# Altium PCB PCB1.PcbDoc (part 1 of 2)
Units mil, origin at the board's own origin, x right, y up, seen from the top; angles counter-clockwise.
Board outline 2835 x 2165.35 mil, 4 copper layers (Top01, GND02, PWR03, Bottom04), stack 23.756 mil thick; 53 components, 129 nets, 681 pads, 268 vias.
Unrouted connection lines stored in the file: 1.
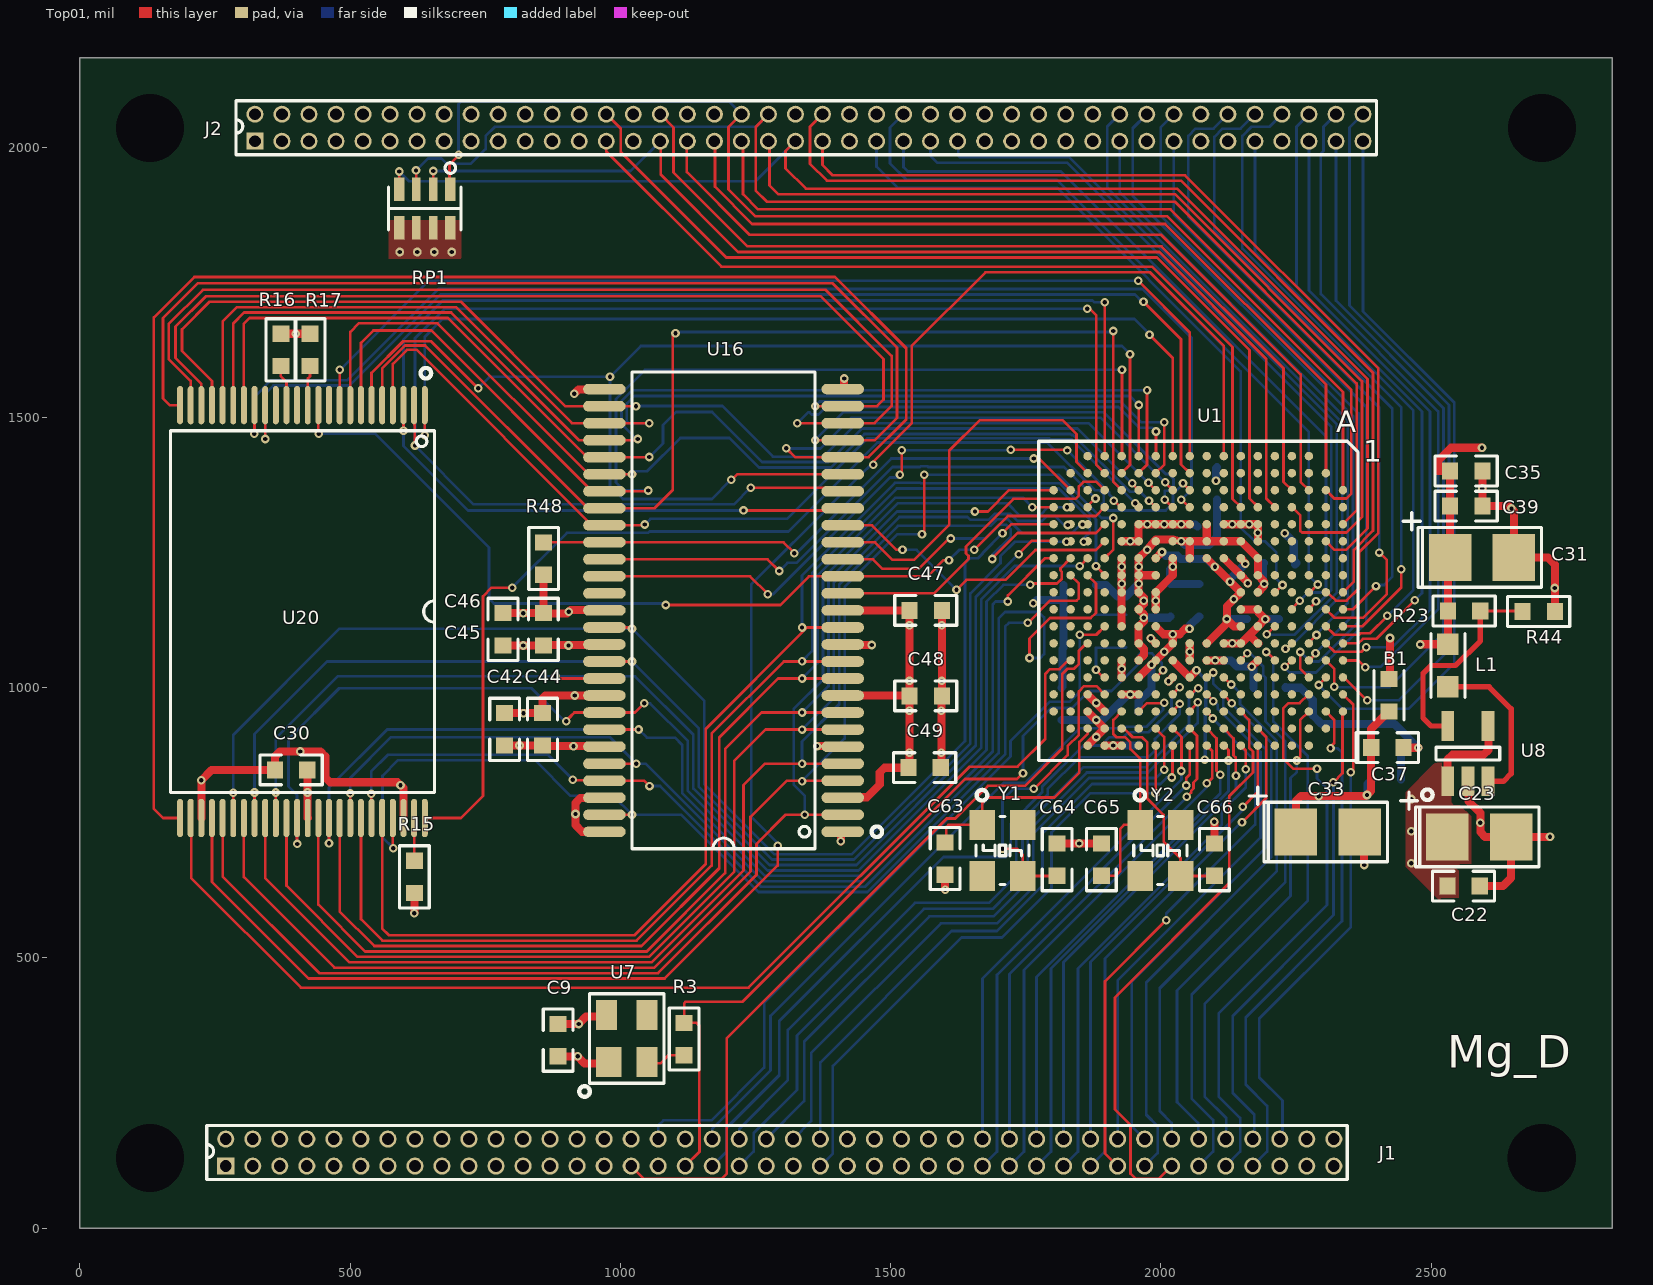
[diagram p0: Top01 view]
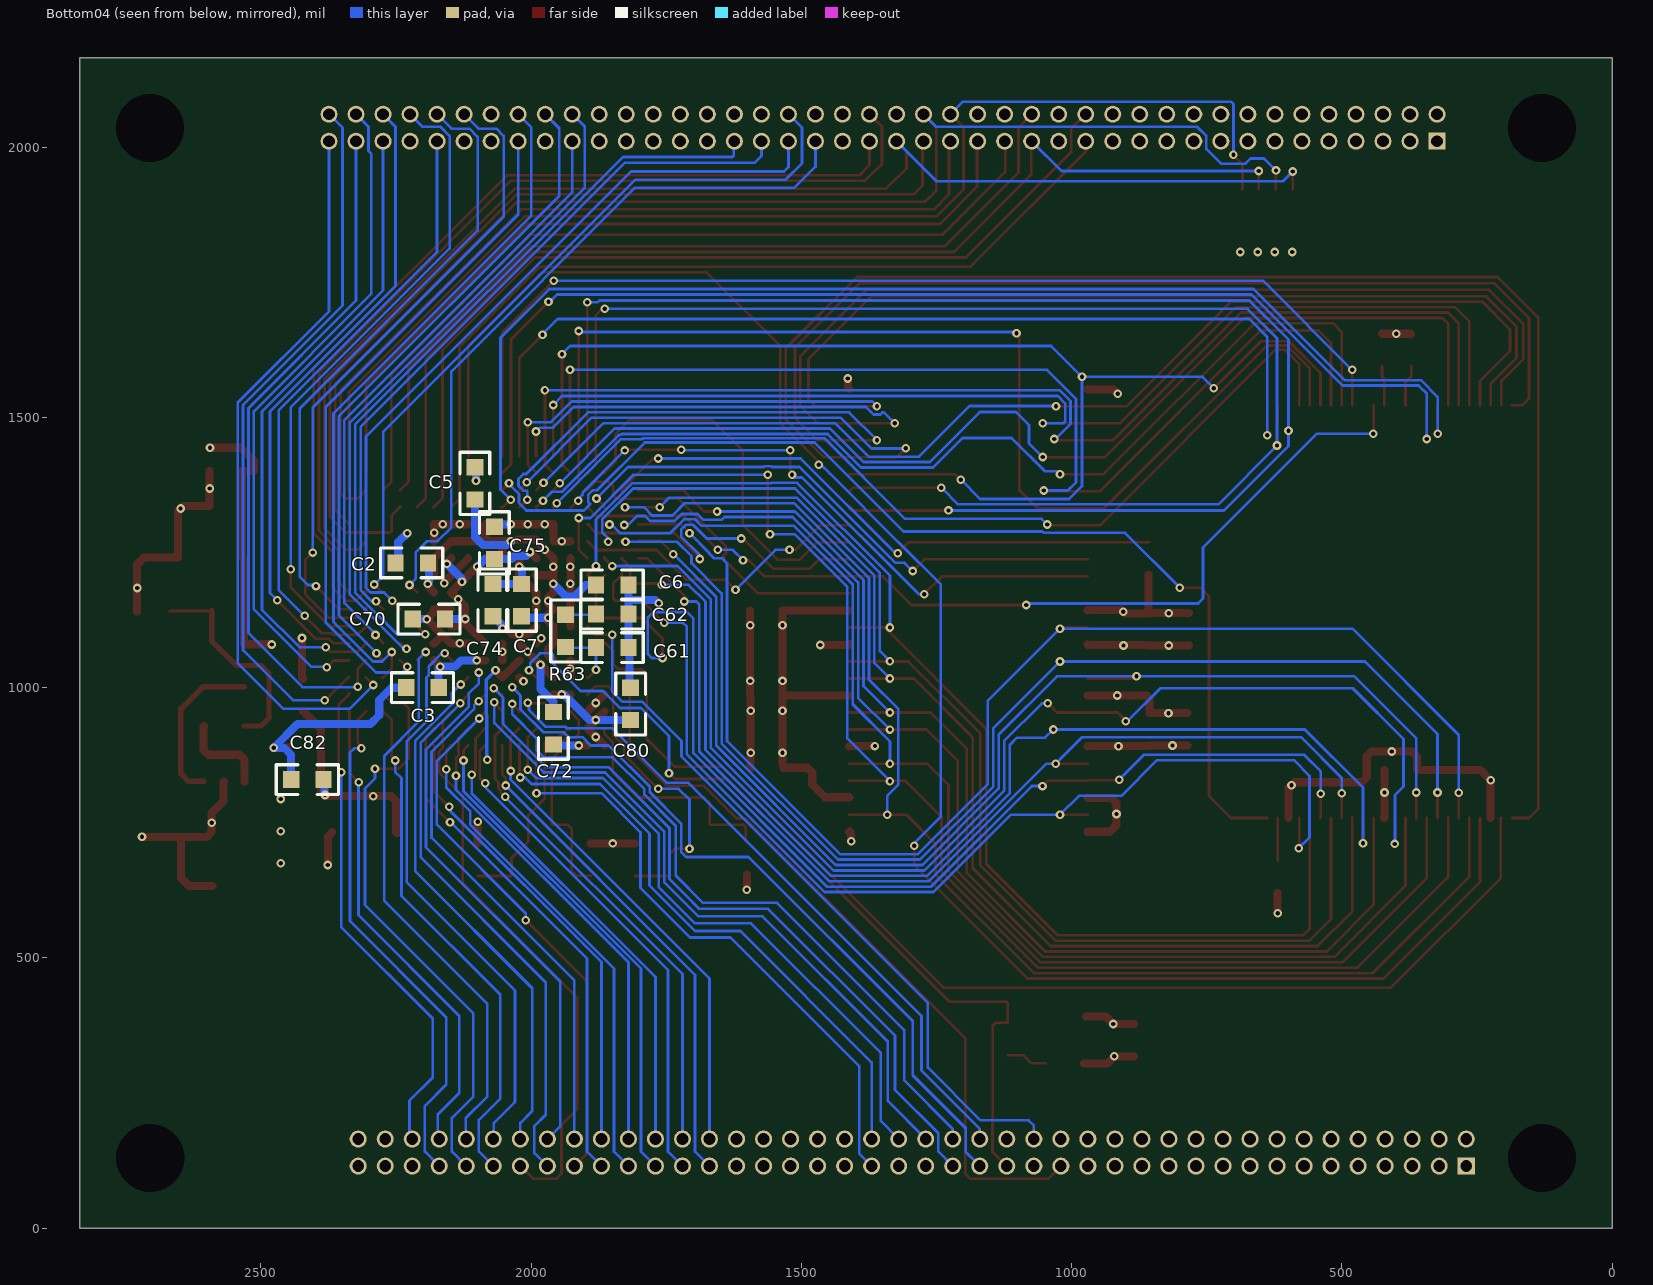
[diagram p1: Bottom04 view, seen from below]
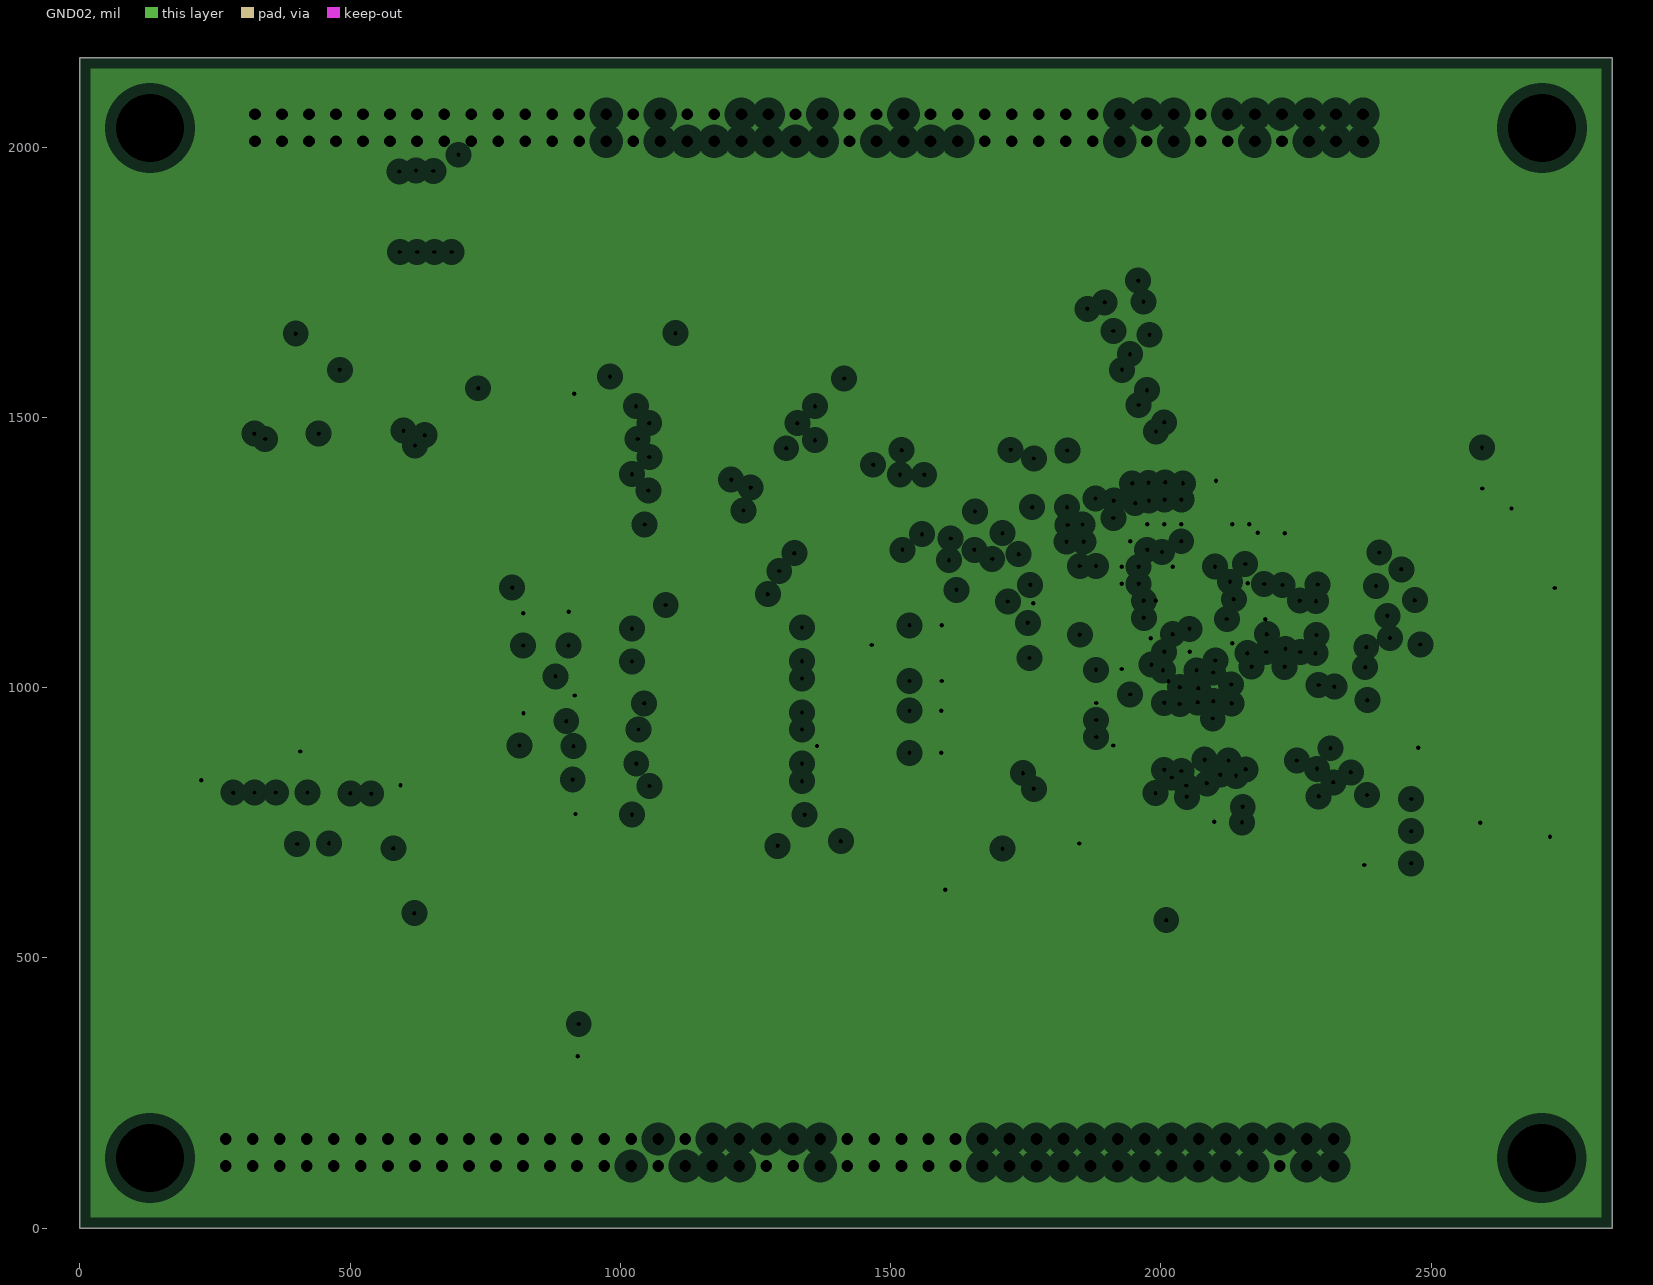
[diagram p2: GND02, clearances drawn from the general rule]
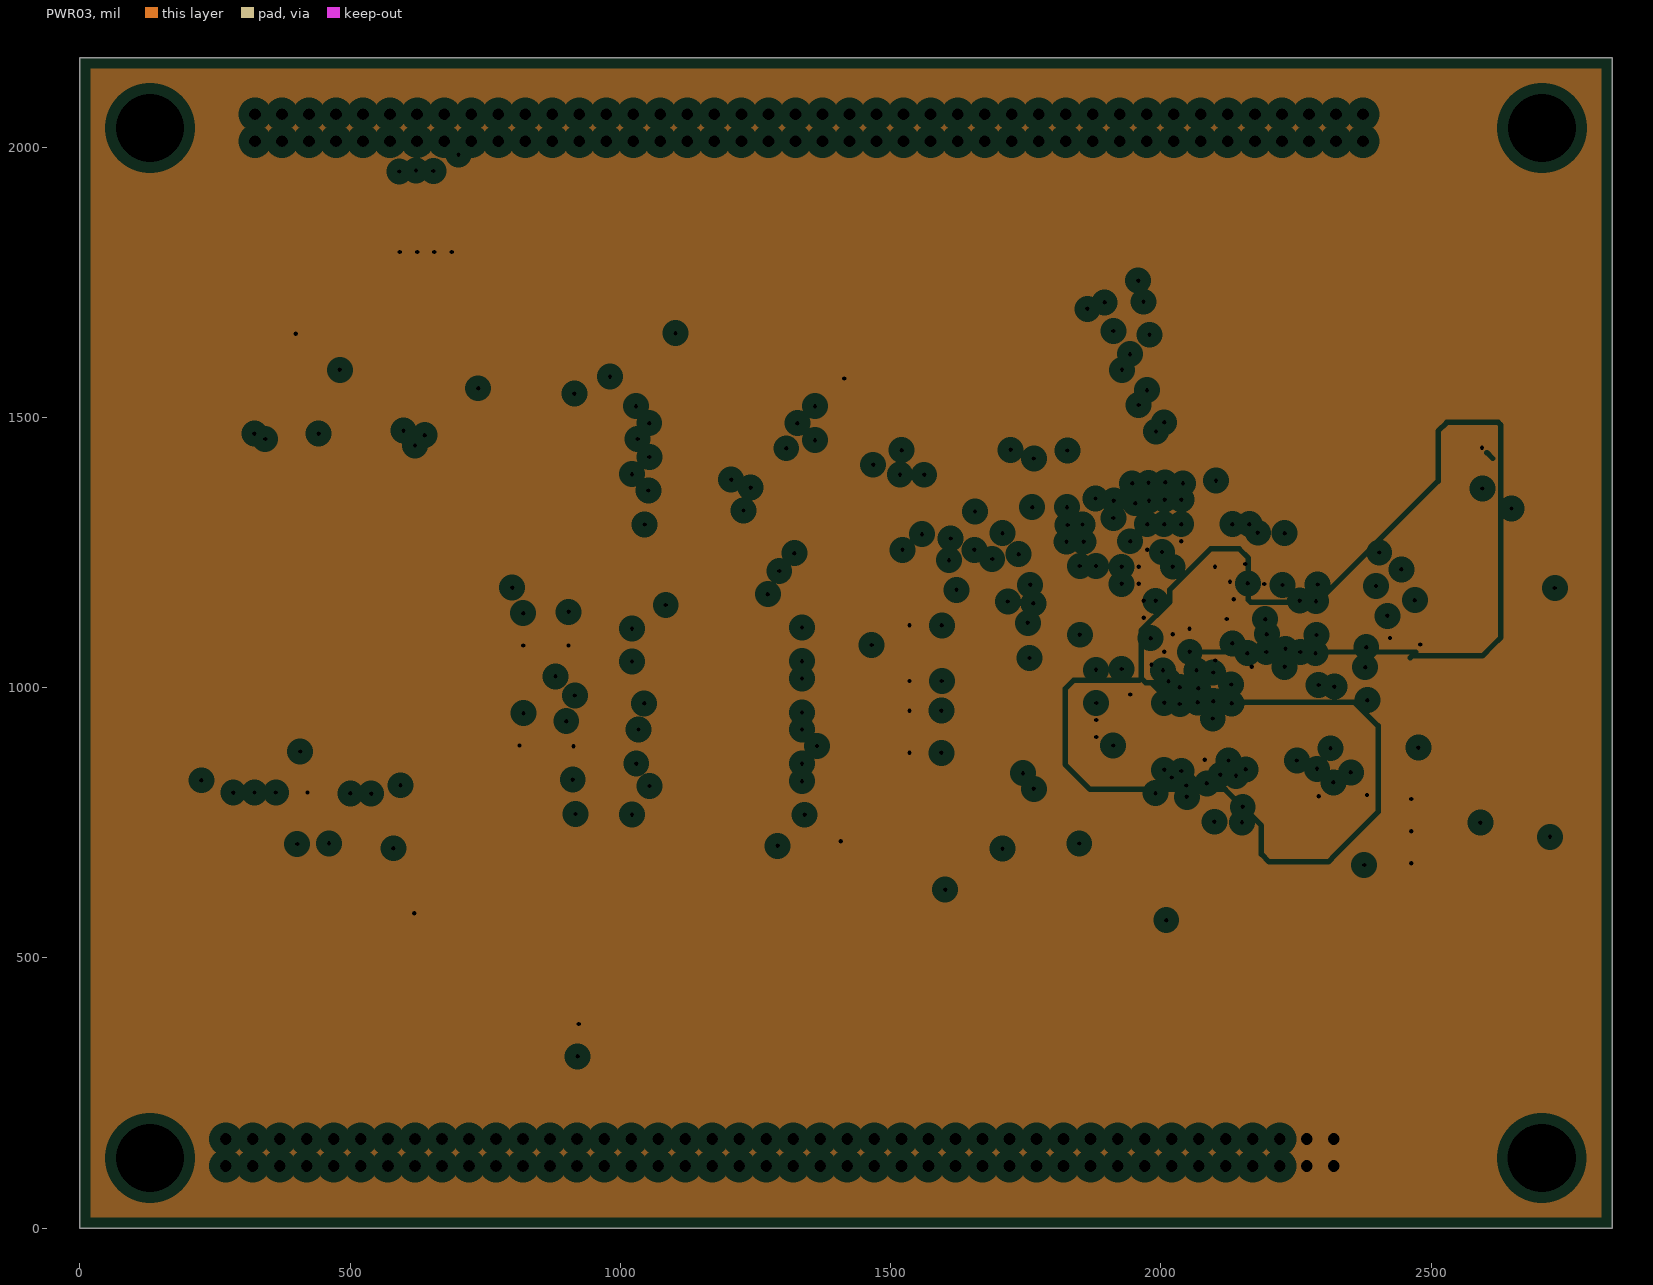
[diagram p3: PWR03, clearances drawn from the general rule]

## Layer stack, top to bottom
Top Solder: solder mask 0.4, Solder Resist, Dk 3.5
Top01: signal copper 1.4
Dielectric 2: prepreg 2.8, PP-006, Dk 4.1
GND02: plane copper 1.378, net GND
Dielectric 1: dielectric 12.6, FR-4, Dk 4.8
PWR03: plane copper 1.378, net (Multiple Nets)
Dielectric 3: prepreg 2.8, PP-006, Dk 4.1
Bottom04: signal copper 1.4
Bottom Solder: solder mask 0.4, Solder Resist, Dk 3.5

## Board outline
0,0 0,2165.35 2835,2165.35 2835,0

## Design rules (kind name [scope] priority, off if disabled: settings)
Clearance PAD-PAD [All] p1: gap=3 ignorepadtopadclearanceinfootprint=TRUE
Clearance [All] p2: gap=0 ignorepadtopadclearanceinfootprint=FALSE
PlaneClearance [All] p1: clearance=20
PlaneConnect [All] p1: planeconnectstyle=Direct reliefexpansion=20 reliefentries=4 reliefconductorwidth=10 reliefairgap=10
PolygonConnect [All] p1: connectstyle=Direct reliefconductorwidth=10 reliefentries=4 polygonreliefangle="90 Angle" airgapwidth=10
RoutingVias [All] p1: holewidth=8 width=16 viastyle="Through Hole" minholewidth=8 minwidth=16 maxholewidth=8 maxwidth=16
SolderMaskExpansion [All] p1: expansion=4
Width PWR [InNetClass('PWR')] p1: maxlimit=40 minlimit=5 preferedwidth=15
Width [All] p2: maxlimit=10 minlimit=5 preferedwidth=5
28 further rules are at their usual default settings.

## Classes and differential pairs
net class PWR: 1V2 1V2_PLL 3V3 GND
net class D[0..31]: D0 D1 D2 D3 D4 D5 D6 D7 D8 D9 D10 D11 D12 D13 D14 D15 D16 D17 D18 D19 D20 D21 D22 D23 D24 D25 D26 D27 D28 D29 D30 D31
net class A[0..23]: A0 A1 A2 A3 A4 A5 A6 A7 A8 A9 A10 A11 A12 A13 A14 A15 A16 A17 A18 A19 A20 A21 A22 A23
component class SDRAM: C42 C44 C45 C46 C47 C48 C49 R48 U16
component class INTERFACE: B1 C9 C22 C23 C31 C33 C35 C37 C39 J1 J2 L1 R3 R23 R44 U7 U8
component class FLASH: C30 C63 C64 C65 C66 R15 R16 R17 U20 Y1 Y2
component class EMC: U1
component class CPU: RP1
component class 01: C61 C62 R63

## Components (designator, comment, footprint, x,y, rotation, side; value= is the part's Value field where it differs from the comment)
B1 "B" 0603 2422,986 r270 top locked
C2 "104" 0603C 2221,1231 r0 bottom locked
C3 "104" 0603C 2201,1000 r0 bottom locked
C5 "104" 0603C 2104,1378 r90 bottom locked
C6 "104" 0603C 1850,1190 r180 bottom locked
C7 "104" 0603C 2018,1162 r90 bottom locked
C9 "104" 0603C 885,348 r270 top locked
C22 "104" 0603C 2560,633 r0 top locked
C23 "22uF" TC-3528 2589.06,724 r0 top locked
C30 "104" 0603C 391,848 r180 top locked
C31 "10uF" TC-3528 2594.06,1241 r0 top locked
C33 "10uF" TC-3528 2309,733 r0 top locked
C35 "103" 0603C 2564.92,1401 r0 top locked
C37 "104" 0603C 2419,889 r0 top locked
C39 "104" 0603C 2564.92,1336 r0 top locked
C42 "104" 0603C 786,923 r90 top locked
C44 "103" 0603C 856,923 r90 top locked
C45 "104" 0603C 857.51,1108 r90 top locked
C46 "104" 0603C 783,1108 r90 top locked
C47 "104" 0603C 1565,1143 r0 top locked
C48 "104" 0603C 1565,985 r0 top locked
C49 "104" 0603C 1563,852 r0 top locked
C61 "150pF 5%" 0603C 1850,1074 r180 bottom locked
C62 "3.9nF 5%" 0603C 1850,1136 r180 bottom locked
C63 "22pF" 0603C 1601,683.92 r270 top locked
C64 "22pF" 0603C 1808,682 r90 top locked
C65 "12pF" 0603C 1890,682 r90 top locked
C66 "12pF" 0603C 2099,682 r90 top locked
C70 "104" 0603C 2189,1127 r0 bottom locked
C72 "104" 0603C 1959,925.08 r270 bottom locked
C74 "104" 0603C 2071,1162 r90 bottom locked
C75 "104" 0603C 2068,1268 r90 bottom locked
C80 "104" 0603C 1816,970 r90 bottom locked
C82 "104" 0603C 2414,830 r0 bottom locked
J1 "CON_PLUG 42 x 2" DIP84 270,115 r90 top locked
J2 "CON_PLUG 42 x 2" DIP84 324,2011 r90 top locked
L1 "2.2uH" 0805 2531,1041 r90 top locked
R3 "470" 0603R 1118,350 r90 top locked
R15 "10K" 0603R 619,650 r270 top locked
R16 "10K" 0603R 372,1625 r90 top locked
R17 "10K" 0603R 426,1625 r90 top locked
R23 "100K 1%" 0603R 2561,1142 r180 top locked
R44 "100K 1%" 0603R 2699,1141 r180 top locked
R48 "10K" 0603R 858,1239 r270 top locked
R63 "120K 1%" 0603R 1936,1105 r90 bottom locked
RP1 "10K" PZ-4-0.8B 638.25,1886.57 r180 top locked
U1 "LPC3250" TFBGA296 2069.21,1160.73 r270 top locked
U7 "MAX811" MAX811 1012,351 r0 top locked
U8 "SP6669" SOT-23-5 2568,878 r0 top locked
U16 "HY57V561620CLT" TSSOP-54 1191,1143 r90 top locked
U20 "SST36VF1601" TSOP-48 411.84,1140.89 r180 top locked
Y1 "13M" XTAL-D 1707,699 r270 top locked
Y2 "32.768K" XTAL-D 1999,699 r270 top locked

## Footprints (in the part's own frame and the unit in brackets; to place one, negate y for a bottom-side part, rotate by r counter-clockwise, add the part's x,y. Pads: shape width x height; smd on the part's side, far side on the other; paste and mask are expansions set on the pad)
0603 [mm]
  rect 0.76x0.8 smd: 1(-0.76,0) 2(0.76,0)
  silkscreen extent -1.15,-0.7 1.15,0.7
0603C [mm]
  rect 0.76x0.8 smd: 1(-0.76,0) 2(0.76,0)
  silkscreen extent -1.46,-0.7 1.46,0.7
0603R [mm]
  rect 0.76x0.8 smd: 1(-0.76,0) 2(0.76,0)
  silkscreen extent -1.46,-0.7 1.46,0.7
0805 [mm]
  rect 1x1 smd: 1(-1,0) 2(1,0)
  silkscreen extent -1.5,-0.8 1.5,0.8
DIP84 [mm]
  rect 0.8x0.8 hole 0.55: 1(0,0)
  round 0.8 hole 0.55: 2(1.27,0) 3(0,-1.27) 4(1.27,-1.27) 5(0,-2.54) 6(1.27,-2.54) 7(0,-3.81) 8(1.27,-3.81) 9(0,-5.08) 10(1.27,-5.08) 11(0,-6.35) 12(1.27,-6.35) 13(0,-7.62) 14(1.27,-7.62) 15(0,-8.89) 16(1.27,-8.89) 17(0,-10.16) 18(1.27,-10.16) 19(0,-11.43) 20(1.27,-11.43) 21(0,-12.7) 22(1.27,-12.7) 23(0,-13.97) 24(1.27,-13.97) 25(0,-15.24) 26(1.27,-15.24) 27(0,-16.51) 28(1.27,-16.51) 29(0,-17.78) 30(1.27,-17.78) 31(0,-19.05) 32(1.27,-19.05) 33(0,-20.32) 34(1.27,-20.32) 35(0,-21.59) 36(1.27,-21.59) 37(0,-22.86) 38(1.27,-22.86) 39(0,-24.13) 40(1.27,-24.13) 41(0,-25.4) 42(1.27,-25.4) 43(0,-26.67) 44(1.27,-26.67) 45(0,-27.94) 46(1.27,-27.94) 47(0,-29.21) 48(1.27,-29.21) 49(0,-30.48) 50(1.27,-30.48) 51(0,-31.75) 52(1.27,-31.75) 53(0,-33.02) 54(1.27,-33.02) 55(0,-34.29) 56(1.27,-34.29) 57(0,-35.56) 58(1.27,-35.56) 59(0,-36.83) 60(1.27,-36.83) 61(0,-38.1) 62(1.27,-38.1) 63(0,-39.37) 64(1.27,-39.37) 65(0,-40.64) 66(1.27,-40.64) 67(0,-41.91) 68(1.27,-41.91) 69(0,-43.18) 70(1.27,-43.18) 71(0,-44.45) 72(1.27,-44.45) 73(0,-45.72) 74(1.27,-45.72) 75(0,-46.99) 76(1.27,-46.99) 77(0,-48.26) 78(1.27,-48.26) 79(0,-49.53) 80(1.27,-49.53) 81(0,-50.8) 82(1.27,-50.8) 83(0,-52.07) 84(1.27,-52.07)
  silkscreen extent -0.64,-52.7 1.91,0.89
MAX811 [mm]
  rect 1.2x1.4 smd: 1(-0.85,-1.1)
  rect 1x1.4 smd: 2(0.95,-1.1) 3(0.95,1.1) 4(-0.95,1.1)
  silkscreen extent -2.23,-2.74 1.75,2.1
PZ-4-0.8B [mm]
  rect 0.5x1.1 smd: 1(-1.2,-0.9) 4(1.2,-0.9) 5(1.2,0.9) 8(-1.2,0.9)
  rect 0.4x1.1 smd: 2(-0.4,-0.9) 3(0.4,-0.9) 6(0.4,0.9) 7(-0.4,0.9)
  silkscreen extent -1.7,-2.15 1.7,1
SOT-23-5 [mm]
  rect 0.6x1.4 smd: 1(-0.95,-1.3) 2(0,-1.3) 3(0.95,-1.3) 4(0.95,1.3) 5(-0.95,1.3)
  silkscreen extent -2.15,-2.18 1.5,0.3
TC-3528 [mm]
  rect 2x2.2 smd: 1(-1.5,0) 2(1.5,0)
  silkscreen extent -3.7,-1.4 2.8,2.1
TFBGA296 [mm]
  round 0.4 smd: A3(-5.2,6.8) A4(-4.4,6.8) A5(-3.6,6.8) A6(-2.8,6.8) A7(-2,6.8) A8(-1.2,6.8) A9(-0.4,6.8) A10(0.4,6.8) A11(1.2,6.8) A12(2,6.8) A13(2.8,6.8) A14(3.6,6.8) A15(4.4,6.8) A16(5.2,6.8) B2(-6,6) B3(-5.2,6) B4(-4.4,6) B5(-3.6,6) B6(-2.8,6) B7(-2,6) B8(-1.2,6) B9(-0.4,6) B10(0.4,6) B11(1.2,6) B12(2,6) B13(2.8,6) B14(3.6,6) B15(4.4,6) B16(5.2,6) B17(6,6) C1(-6.8,5.2) C2(-6,5.2) C3(-5.2,5.2) C4(-4.4,5.2) C5(-3.6,5.2) C6(-2.8,5.2) C7(-2,5.2) C8(-1.2,5.2) C9(-0.4,5.2) C10(0.4,5.2) C11(1.2,5.2) C12(2,5.2) C13(2.8,5.2) C14(3.6,5.2) C15(4.4,5.2) C16(5.2,5.2) C17(6,5.2) C18(6.8,5.2) D1(-6.8,4.4) D2(-6,4.4) D3(-5.2,4.4) D4(-4.4,4.4) D5(-3.6,4.4) D6(-2.8,4.4) D7(-2,4.4) D8(-1.2,4.4) D9(-0.4,4.4) D10(0.4,4.4) D11(1.2,4.4) D12(2,4.4) D13(2.8,4.4) D14(3.6,4.4) D15(4.4,4.4) D16(5.2,4.4) D17(6,4.4) D18(6.8,4.4) E1(-6.8,3.6) E2(-6,3.6) E3(-5.2,3.6) E4(-4.4,3.6) E5(-3.6,3.6) E6(-2.8,3.6) E7(-2,3.6) E8(-1.2,3.6) E9(-0.4,3.6) E10(0.4,3.6) E11(1.2,3.6) E12(2,3.6) E13(2.8,3.6) E14(3.6,3.6) E15(4.4,3.6) E16(5.2,3.6) E17(6,3.6) E18(6.8,3.6) F1(-6.8,2.8) F2(-6,2.8) F3(-5.2,2.8) F4(-4.4,2.8) F5(-3.6,2.8) F6(-2.8,2.8) F7(-2,2.8) F8(-1.2,2.8) F9(-0.4,2.8) F10(0.4,2.8) F11(1.2,2.8) F12(2,2.8) F13(2.8,2.8) F14(3.6,2.8) F15(4.4,2.8) F16(5.2,2.8) F17(6,2.8) F18(6.8,2.8) G1(-6.8,2) G2(-6,2) G3(-5.2,2) G4(-4.4,2) G5(-3.6,2) G6(-2.8,2) G7(-2,2) G8(-1.2,2) G9(-0.4,2) G10(0.4,2) G11(1.2,2) G12(2,2) G13(2.8,2) G14(3.6,2) G15(4.4,2) G16(5.2,2) G17(6,2) G18(6.8,2) H1(-6.8,1.2) H2(-6,1.2) H3(-5.2,1.2) H4(-4.4,1.2) H5(-3.6,1.2) H6(-2.8,1.2) H7(-2,1.2) H12(2,1.2) H13(2.8,1.2) H14(3.6,1.2) H15(4.4,1.2) H16(5.2,1.2) H17(6,1.2) H18(6.8,1.2) J1(-6.8,0.4) J2(-6,0.4) J3(-5.2,0.4) J4(-4.4,0.4) J5(-3.6,0.4) J6(-2.8,0.4) J7(-2,0.4) J12(2,0.4) J13(2.8,0.4) J14(3.6,0.4) J15(4.4,0.4) J16(5.2,0.4) J17(6,0.4) J18(6.8,0.4) K1(-6.8,-0.4) K2(-6,-0.4) K3(-5.2,-0.4) K4(-4.4,-0.4) K5(-3.6,-0.4) K6(-2.8,-0.4) K7(-2,-0.4) K12(2,-0.4) K13(2.8,-0.4) K14(3.6,-0.4) K15(4.4,-0.4) K16(5.2,-0.4) K17(6,-0.4) K18(6.8,-0.4) L1(-6.8,-1.2) L2(-6,-1.2) L3(-5.2,-1.2) L4(-4.4,-1.2) L5(-3.6,-1.2) L6(-2.8,-1.2) L7(-2,-1.2) L12(2,-1.2) L13(2.8,-1.2) L14(3.6,-1.2) L15(4.4,-1.2) L16(5.2,-1.2) L17(6,-1.2) L18(6.8,-1.2) M1(-6.8,-2) M2(-6,-2) M3(-5.2,-2) M4(-4.4,-2) M5(-3.6,-2) M6(-2.8,-2) M7(-2,-2) M8(-1.2,-2) M9(-0.4,-2) M10(0.4,-2) M11(1.2,-2) M12(2,-2) M13(2.8,-2) M14(3.6,-2) M15(4.4,-2) M16(5.2,-2) M17(6,-2) M18(6.8,-2) N1(-6.8,-2.8) N2(-6,-2.8) N3(-5.2,-2.8) N4(-4.4,-2.8) N5(-3.6,-2.8) N6(-2.8,-2.8) N7(-2,-2.8) N8(-1.2,-2.8) N9(-0.4,-2.8) N10(0.4,-2.8) N11(1.2,-2.8) N12(2,-2.8) N13(2.8,-2.8) N14(3.6,-2.8) N15(4.4,-2.8) N16(5.2,-2.8) N17(6,-2.8) N18(6.8,-2.8) P1(-6.8,-3.6) P2(-6,-3.6) P3(-5.2,-3.6) P4(-4.4,-3.6) P5(-3.6,-3.6) P6(-2.8,-3.6) P7(-2,-3.6) P8(-1.2,-3.6) P9(-0.4,-3.6) P10(0.4,-3.6) P11(1.2,-3.6) P12(2,-3.6) P13(2.8,-3.6) P14(3.6,-3.6) P15(4.4,-3.6) P16(5.2,-3.6) P17(6,-3.6) P18(6.8,-3.6) R1(-6.8,-4.4) R2(-6,-4.4) R3(-5.2,-4.4) R4(-4.4,-4.4) R5(-3.6,-4.4) R6(-2.8,-4.4) R7(-2,-4.4) R8(-1.2,-4.4) R9(-0.4,-4.4) R10(0.4,-4.4) R11(1.2,-4.4) R12(2,-4.4) R13(2.8,-4.4) R14(3.6,-4.4) R15(4.4,-4.4) R16(5.2,-4.4) R17(6,-4.4) R18(6.8,-4.4) T1(-6.8,-5.2) T2(-6,-5.2) T3(-5.2,-5.2) T4(-4.4,-5.2) T5(-3.6,-5.2) T6(-2.8,-5.2) T7(-2,-5.2) T8(-1.2,-5.2) T9(-0.4,-5.2) T10(0.4,-5.2) T11(1.2,-5.2) T12(2,-5.2) T13(2.8,-5.2) T14(3.6,-5.2) T15(4.4,-5.2) T16(5.2,-5.2) T17(6,-5.2) T18(6.8,-5.2) U2(-6,-6) U3(-5.2,-6) U4(-4.4,-6) U5(-3.6,-6) U6(-2.8,-6) U7(-2,-6) U8(-1.2,-6) U9(-0.4,-6) U10(0.4,-6) U11(1.2,-6) U12(2,-6) U13(2.8,-6) U14(3.6,-6) U15(4.4,-6) U16(5.2,-6) U17(6,-6) V3(-5.2,-6.8) V4(-4.4,-6.8) V5(-3.6,-6.8) V6(-2.8,-6.8) V7(-2,-6.8) V8(-1.2,-6.8) V9(-0.4,-6.8) V10(0.4,-6.8) V11(1.2,-6.8) V12(2,-6.8) V13(2.8,-6.8) V14(3.6,-6.8) V15(4.4,-6.8) V16(5.2,-6.8)
  silkscreen extent -7.5,-7.5 7.5,7.5
TSOP-48 [mm]
  oval 0.28x1.8 smd: 1(-5.75,-9.7) 2(-5.25,-9.7) 3(-4.75,-9.7) 4(-4.25,-9.7) 5(-3.75,-9.7) 6(-3.25,-9.7) 7(-2.75,-9.7) 8(-2.25,-9.7) 9(-1.75,-9.7) 10(-1.25,-9.7) 11(-0.75,-9.7) 12(-0.25,-9.7) 13(0.25,-9.7) 14(0.75,-9.7) 15(1.25,-9.7) 16(1.75,-9.7) 17(2.25,-9.7) 18(2.75,-9.7) 19(3.25,-9.7) 20(3.75,-9.7) 21(4.25,-9.7) 22(4.75,-9.7) 23(5.25,-9.7) 24(5.75,-9.7) 25(5.75,9.7) 26(5.25,9.7) 27(4.75,9.7) 28(4.25,9.7) 29(3.75,9.7) 30(3.25,9.7) 31(2.75,9.7) 32(2.25,9.7) 33(1.75,9.7) 34(1.25,9.7) 35(0.75,9.7) 36(0.25,9.7) 37(-0.25,9.7) 38(-0.75,9.7) 39(-1.25,9.7) 40(-1.75,9.7) 41(-2.25,9.7) 42(-2.75,9.7) 43(-3.25,9.7) 44(-3.75,9.7) 45(-4.25,9.7) 46(-4.75,9.7) 47(-5.25,9.7) 48(-5.75,9.7)
  silkscreen extent -6.2,-11.45 6.2,8.5
TSSOP-54 [mm]
  oval 0.5x2 smd: 1(-10.4,-5.6) 2(-9.6,-5.6) 3(-8.8,-5.6) 4(-8,-5.6) 5(-7.2,-5.6) 6(-6.4,-5.6) 7(-5.6,-5.6) 8(-4.8,-5.6) 9(-4,-5.6) 10(-3.2,-5.6) 11(-2.4,-5.6) 12(-1.6,-5.6) 13(-0.8,-5.6) 14(0,-5.6) 15(0.8,-5.6) 16(1.6,-5.6) 17(2.4,-5.6) 18(3.2,-5.6) 19(4,-5.6) 20(4.8,-5.6) 21(5.6,-5.6) 22(6.4,-5.6) 23(7.2,-5.6) 24(8,-5.6) 25(8.8,-5.6) 26(9.6,-5.6) 27(10.4,-5.6) 28(10.4,5.6) 29(9.6,5.6) 30(8.8,5.6) 31(8,5.6) 32(7.2,5.6) 33(6.4,5.6) 34(5.6,5.6) 35(4.8,5.6) 36(4,5.6) 37(3.2,5.6) 38(2.4,5.6) 39(1.6,5.6) 40(0.8,5.6) 41(0,5.6) 42(-0.8,5.6) 43(-1.6,5.6) 44(-2.4,5.6) 45(-3.2,5.6) 46(-4,5.6) 47(-4.8,5.6) 48(-5.6,5.6) 49(-6.4,5.6) 50(-7.2,5.6) 51(-8,5.6) 52(-8.8,5.6) 53(-9.6,5.6) 54(-10.4,5.6)
  silkscreen extent -11.2,-7.45 11.2,4.3
XTAL-D [mm]
  rect 1.4x1.2 smd: 1(-1.2,-0.95) 2(1.2,0.95) 3(1.2,-0.95) 4(-1.2,0.95)
  silkscreen extent -2.84,-1.25 1.6,1.25

## Part data
C2 C3 C5 C6 C7 C9 C22 C30 C35 C37 C39 C42 C44 C45 C46 C47 C48 C49 C61 C62 C63 C64 C65 C66 C70 C72 C74 C75 C80 C82: library part CAP
C23 C31 C33: library part CAP_1
L1: library part INDUCTOR
R3 R15 R16 R17 R23 R44 R48 R63: library part RES
RP1: library part RP
Y1 Y2: library part Y

## Free pads (board coordinates)
  round 0 hole 125.98: 67(130,130) 67(130,2035.35) 68(2704.65,130) 69(2705,2035.35)

## Via types
v1: diameter 16, hole 8, Top01 to Bottom04, tented both sides, 268 vias

## Nets (pads, with @x,y where several pads share a name; then routed paths per layer and width w, separated by ;. In a path a pad name is that pad's centre, name@x,y a point inside that pad or via, vN(x,y) a via of type N, cw(c..) or ccw(c..) an arc to the next point about the centre after c; other vN are vias at no path point)
1V2: B1.1 C31.1 C35.1 C39.1 C70.1 C72.1 C74.1 C75.1 L1.2 R23.2 U1.G7 U1.G9 U1.G11 U1.J7 U1.J12 U1.L12 U1.M7 U1.M11 U1.M13 U1.N14 | length 1461.7
  Top01 w15: U1.N14@1958.97,1019 v1(1982.59,1042.62) U1.M13@1990.46,1050.5 v1(2006.21,1066.24) U1.L12@2021.96,1081.99 v1(2021.96,1098.96) ; U1.M11@1990.46,1113.49 2004.99,1098.96 v1(2021.96,1098.96) ; U1.M7@1990.46,1239.47 v1(2002,1250.97) ; v1(2053,1109) 2045,1109 2034.96,1098.96 v1(2021.96,1098.96) ; U1.J12@2084.81,1082.14 U1.J12@2084.95,1081.99 2121.81,1118.85 2121.81,1126.81 v1(2122,1127) ; U1.J7@2084.95,1239.47 U1.G9@2147.95,1176.48 ; v1@2100.21,1224.21 U1.G9@2147.95,1176.48 ; v1@2125.98,1123.02 2135.51,1113.49 ; v1@2128.21,1196.21 U1.G9@2147.95,1176.48 ; U1.G7@2147.74,1239.47 U1.G7@2147.95,1239.47 2147.95,1239.27 2156,1231.22 v1(2156,1229) ; U1.G11@2147.95,1113.49 2135.51,1113.49 ; B1.1@2422,1015.92 2424,1017.92 v1(2424,1092) ; v1(2480,1080) 2480.37,1080.37 L1.2@2531,1080.37 L1.2@2531,1080.37 2531.04,1141.96 R23.2@2531.08,1142 2531.08,1237.08 C31.1@2535,1241 C39.1@2535,1336 C35.1@2535,1401 2512.54,1401 2512.54,1419.85 2536.68,1444 v1(2594,1444) ; v1(2122,1127) 2135.51,1113.49 ; v1(2122,1127) 2122.19,1127.19 2122.19,1150.73 v1(2135.07,1163.6) U1.G9@2147.95,1176.48
  Bottom04 w15: C72.1@1959,955 1959,974.29 1982.59,997.88 v1(1982.59,1042.62) ; v1(2002,1250.97) 2002.27,1250.97 2009.01,1244.22 2030.45,1244.22 2036.6,1238.08 C75.1@2068,1238.08 2085.65,1238.08 2099.54,1224.19 2099.81,1224.19 v1(2100,1224) ; v1(2053,1109) 2053.19,1109.19 2053.19,1115.06 2070.21,1132.08 C74.1@2071,1132.08 ; v1(2122,1127) C70.1@2159.08,1127 ; v1(2128,1196) 2128.19,1196.19 2128.19,1201.19 v1(2156,1229)
1V2_PLL: B1.2 C33.1 C37.1 C80.1 C82.1 U1.K14 U1.L13 U1.N15 U1.P15 U1.R17 U1.T16 U1.T18 | length 903.2
  Top01 w15: U1.T18@1864.48,893.02 v1(1880.23,908.76) U1.R17@1895.98,924.51 U1.T16@1864.48,956.01 ; U1.P15@1927.47,987.5 v1(1943.22,987.5) U1.N15@1958.97,987.5 ; U1.L13@2021.96,1050.5 U1.K14@2053.46,1019 2053.46,1019.2 2066,1031.75 v1(2066,1032) ; C33.1@2248,731.06 C33.1@2249.94,733 2249.94,790.94 2259,800 2380,800 v1(2381.44,801.44) 2389.08,809.08 C37.1@2389.08,889 2389.08,923.94 2421.21,956.08 B1.2@2422,956.08
  Bottom04 w6: v1@2066,1031.73 2083,1014.73 2083,949.92 2082,948.92 2082,867 v1(2081,867)
  Bottom04 w15: C80.1@1816,940.08 1816.09,940.17 1880.14,940.17 v1(1880.23,940.26) 1880.42,940.45 1892.06,940.45 1939.11,987.5 v1(1943.22,987.5) ; v1@2066,1031.73 v1(2066,1032) ; v1(2381.44,801.44) 2381.44,801.71 2382.62,802.89 2382.62,821.54 C82.1@2390.08,829
  other v1: 2292,799
3V3: C2.1 C3.1 C5.1 C6.1 C7.1 C9.1 C22.1 C23.1 C30.1 C42.1 C44.1 C45.1 C46.1 C47.1 C48.1 C49.1 J1.81 J1.82 J1.83 J1.84 R15.2 R16.2 R17.2 RP1.5 RP1.6 RP1.7 RP1.8 U1.F7 U1.F8 U1.F9 U1.F13 U1.G6 U1.H6 U1.H13 U1.J5 U1.J6 U1.J13 U1.K6 U1.K7 U1.L6 U1.M6 U1.M8 U1.N7 U1.N8 U1.N9 U1.N10 U1.N11 U1.N12 U1.N13 U7.4 U8.1 U8.4 U16.1 U16.3 U16.9 U16.14 U16.27 U16.43 U16.49 U20.37 | length 2667.8
  Top01 w15: R16.2@372,1654.92 v1(399.56,1654.92) R17.2@426,1654.92 ; C30.1@420.92,848 421.3,847.62 v1(421.3,806.24) 421.3,759.38 U20.37@421.69,759 ; v1(619,583) R15.2@619,620.08 ; C46.1@783,1078.08 v1(820.26,1078.08) C45.1@857.51,1078.08 858.54,1079.11 969.63,1079.11 U16.43@970.53,1080.01 ; C42.1@786,893.08 v1(813.56,893.08) C44.1@856,893.08 857.15,891.93 v1(913.39,891.93) 969.63,891.93 U16.49@970.53,891.03 ; C9.1@885,377.92 v1(923.03,377.92) 936.79,391.68 U7.4@973.54,391.68 ; v1(1408,716) 1408,731.39 1410.16,733.55 U16.1@1411.47,733.55 ; U16.3@1411.47,796.54 1412.2,797.27 1456.27,797.27 1480,821 1480,843.21 1488.79,852 C49.1@1533.08,852 ; U16.9@1411.47,985.52 1411.73,985.26 1534.82,985.26 C48.1@1535.08,985 ; U16.14@1411.47,1143 C47.1@1535.08,1143 v1(1535.08,1115.44) v1(1535.08,1012.56) C48.1@1535.08,985 ; U16.27@1411.47,1552.45 1411.84,1552.45 1414,1554.61 v1(1414,1572) ; C49.1@1535.08,860 v1(1535.08,879.56) v1(1535.08,957.44) C48.1@1535.08,985 ; U1.N13@1958.97,1050.5 1958.97,1050.7 1969,1060.73 1969,1061 1968.81,1061.19 1968.81,1071.95 1958.97,1081.79 U1.N12@1958.97,1081.99 U1.N11@1958.97,1113.49 1959.17,1113.49 1968.6,1122.92 v1(1968.6,1129.14) 1968.6,1135.35 U1.N10@1958.97,1144.98 1958.97,1145.19 1968.4,1154.62 v1(1968.4,1160.83) 1968.4,1167.05 U1.N9@1958.97,1176.48 v1(1958.97,1192.23) U1.N8@1958.97,1207.98 ; U1.M8@1990.46,1207.98 U1.N8@1958.97,1207.98 ; U1.K7@2053.46,1239.47 U1.K6@2053.46,1270.97 ; U1.J13@2084.95,1050.5 v1(2100.7,1050.5) U1.H13@2116.45,1050.5 ; U1.J5@2084.95,1302.46 U1.J6@2084.95,1270.97 ; v1(2168,1039) 2179.44,1050.44 U1.F13@2179.44,1050.5 U1.F13@2179.44,1050.7 ; U1.F9@2179.44,1176.48 2191,1188.04 v1(2191,1192) 2191,1196.42 U1.F8@2179.44,1207.98 U1.F7@2179.44,1239.47 U1.G6@2147.95,1270.97 U1.H6@2116.45,1270.97 U1.J6@2084.95,1270.97 ; U8.1@2530.6,826.82 2530.6,867.21 2539.39,876 2597.21,876 2606,884.79 2606,928.58 U8.4@2605.4,929.18 ; U1.N8@1958.97,1207.98 v1(1958.97,1223.72) U1.N7@1958.97,1239.47 v1(1974.72,1255.22) 1988.99,1272.21 1990.46,1273.97 2021.96,1273.97 2022.51,1273.86 v1(2037.71,1270.97) U1.K6@2053.46,1270.97 ; U1.K6@2053.46,1270.97 U1.J6@2084.95,1270.97
  Bottom04 w15: C6.1@1879.92,1190 1899,1190 1920,1169 1935.74,1169 v1(1958.97,1192.23) ; v1(1968.6,1129.14) 1968.8,1129.33 2015.25,1129.33 C7.1@2018,1132.08 ; v1@2037.9,1270.78 v1(2037.71,1270.97) 2037.98,1270.97 2044.95,1264 2089.28,1264 2104,1278.72 C5.1@2104,1348.08 ; v1(2100.7,1050.5) 2100.89,1050.3 2129.7,1050.3 2140.81,1039.19 2167.81,1039.19 v1(2168,1039) 2171.08,1035.92 C3.1@2171.08,1000 ; v1(2191,1192) 2189,1194 2189,1228.92 C2.1@2191.08,1231
  other v1: 2463,675 2463,734.5 2463,794 904,1078 592,1806 624,1806 656,1806 688,1806
A0: U1.L3 U16.23 U20.25 | length 3628
  Top01 w5: U20.25@185.46,759 154,759 137,776 137,1685 212,1760 1397,1760 1529,1628 1529,1496 1459.46,1426.46 U16.23@1411.47,1426.46 1323.54,1426.46 v1(1307,1443) ; v1(2008,1380) 2021.96,1366.04 U1.L3@2021.96,1365.46 U1.L3@2020.54,1365.46
  Bottom04 w5: v1(1307,1443) 1307.54,1442.46 1370.46,1442.46 1427.5,1499.5 1888.5,1499.5 v1(2008,1380)
A1: U1.L4 U16.24 U20.24 | length 2726.8
  Top01 w5: U20.24@185.46,1522.78 166.22,1522.78 154,1535 154,1684 218,1748 1393,1748 1512,1629 1512,1499 1470.96,1457.96 U16.24@1411.47,1457.96 v1(1360.29,1457.96) 1359.04,1457.96 v1@1358,1459 ; v1(2007,1348) 2021.04,1333.96 U1.L4@2021.96,1333.96 U1.L4@2021.96,1333.96
  Bottom04 w5: v1(1360.29,1457.96) 1411.83,1509.5 1895.04,1509.5 2009.04,1395.5 2014.42,1395.5 2023.5,1386.42 2023.5,1373.58 2014.42,1364.5 2007,1364.5 v1(2007,1348)
A2: U1.M1 U16.25 U20.23 | length 2606.7
  Top01 w5: U20.23@205.15,1522.78 205.15,1567.26 170.7,1601.7 164.5,1607.91 164.5,1672.5 228,1736 1380,1736 1502,1614 1502,1521 1470.46,1489.46 U16.25@1411.47,1489.46 v1(1327.54,1489.46) v1@1327,1490 ; U1.M1@1990,1428.91 U1.M1@1990.46,1428.45 1991,1428.98 v1(1991,1474)
  Bottom04 w5: v1(1327.54,1489.46) 1347.59,1509.5 1349.82,1509.5 1353.87,1505.45 1366.71,1505.45 1380.76,1519.5 1921.31,1519.5 1959.81,1481 1984,1481 v1(1991,1474)
A3: U1.M2 U16.26 U20.22 | length 2523.8
  Top01 w5: U20.22@224.83,1522.78 224.83,1562.04 177,1609.88 177,1668 233,1724 1371,1724 1487,1608 1487,1533 1474.95,1520.95 U16.26@1411.47,1520.95 v1(1360.29,1520.95) 1357.05,1520.95 v1@1357,1521 ; U1.M2@1989.05,1396.95 U1.M2@1990.46,1396.95 2006.5,1412.99 2006.5,1490.5 v1(2006,1491)
  Bottom04 w5: v1(1360.29,1520.95) 1368.84,1529.5 1925.45,1529.5 1963.95,1491 v1(2006,1491)
A4: U1.M3 U16.29 U20.21 | length 2181.5
  Top01 w5: U20.21@244.52,1522.78 244.52,1567.48 189.07,1622.93 189.07,1663 240.07,1714 705,1714 898.05,1520.95 U16.29@970.53,1520.95 v1(1029,1521) v1(1029,1521) ; v1(1977,1379) U1.M3@1990.46,1365.46 U1.M3@1990.46,1365.46
  Bottom04 w5: v1(1029,1521) 1189.01,1521 1282.51,1427.5 1375.5,1427.5 1437.5,1489.5 1866.5,1489.5 v1(1977,1379)
A5: U1.N1 U16.30 U20.20 | length 2174.6
  Top01 w5: U20.20@264.2,1522.78 264.2,1677.2 291,1704 696,1704 910.54,1489.46 U16.30@970.53,1489.46 v1(1053.54,1489.46) v1@1054,1489 ; U1.N1@1959,1428.48 v1(1959,1523)
  Bottom04 w5: v1(1053.54,1489.46) 1014.96,1489.46 1012.04,1492.39 1012.04,1525.96 1025.58,1539.5 1942.5,1539.5 v1(1959,1523)
A6: U1.N2 U16.31 U20.19 | length 2230.7
  Top01 w5: U20.19@283.89,1522.78 283.89,1673.89 304,1694 687,1694 923.04,1457.96 U16.31@970.53,1457.96 1029.96,1457.96 v1(1032,1460) ; U1.N2@1958.97,1396.95 U1.N2@1958.97,1396.95 1974.5,1412.48 v1(1974.5,1550.5)
  Bottom04 w5: v1(1032,1460) 1030.28,1460 1002.04,1488.24 1002.04,1530.1 1022.44,1550.5 v1(1974.5,1550.5)
A7: U1.N3 U16.32 U20.18 | length 2083.6
  Top01 w5: U20.18@303.57,1522.78 303.57,1673.57 314,1684 681,1684 938.54,1426.46 U16.32@970.53,1426.46 1053.46,1426.46 v1(1053.73,1426.73) v1@1054,1427 ; v1(1947,1378) 1958.97,1366.03 U1.N3@1958.97,1365.46
  Bottom04 w5: v1(1053.73,1426.73) 1079,1452 1079,1486 1103,1510 1170,1510 1262.5,1417.5 1385.22,1417.5 1447.22,1479.5 1845.5,1479.5 v1(1947,1378)
A8: U1.M4 U16.33 U20.8 | length 1887.5
  Top01 w5: U20.8@500.43,1522.78 500.43,1658.43 516,1674 661.97,1674 941,1394.97 U16.33@970.53,1394.97 v1(1021.71,1394.97) v1@1026.97,1394.97 ; v1(1978,1346) 1990.04,1333.96 U1.M4@1990.46,1333.96 U1.M4@1990.46,1335.54
  Bottom04 w5: v1(1021.71,1394.97) 1027.24,1400.5 1049.42,1400.5 1110.92,1462 1202,1462 1256.5,1407.5 1389.36,1407.5 1451.36,1469.5 1832.5,1469.5 1834.5,1467.5 1837.81,1467.5 1942.81,1362.5 1961.5,1362.5 v1(1978,1346) v1@1978,1346.71
A9: U1.P1 U16.34 U20.7 | length 2120.3
  Top01 w5: U20.7@520.11,1522.78 520.11,1638.11 543,1661 650.44,1661 947.97,1363.47 U16.34@970.53,1363.47 1050.47,1363.47 v1(1051.74,1364.74) v1@1053,1366 ; U1.P1@1927.47,1428.45 1928,1428.98 v1(1928,1588)
  Bottom04 w5: v1(1051.74,1364.74) 1007.26,1364.74 992.04,1379.96 992.04,1534.24 1045.8,1588 v1(1928,1588)
A10: U1.P2 U16.22 U20.6 | length 2450.2
  Top01 w5: U20.6@539.8,1522.78 539.8,1582.42 598.37,1641 650,1641 v1(737,1554) ; v1@1205.5,1385.5 v1(1205,1385) 1206.98,1385 1216.95,1394.97 U16.22@1411.47,1394.97 ; U1.P2@1927.47,1396.95 1943,1412.48 v1(1943,1617)
  Bottom04 w5: v1(737,1554) 758.01,1575.01 v1@981,1575.01 ; v1(1205,1385) 1169.24,1349.24 1004.6,1349.24 981,1372.83 v1@981,1575.01 ; v1(1943,1617) 1928,1632 1037.99,1632 v1@981,1575.01
  other v1: 981,1575.51
A11: U1.P3 U16.35 U20.5 | length 2168.4
  Top01 w5: U20.5@559.48,1522.78 559.48,1590.79 601.69,1633 638.91,1633 939.93,1331.98 U16.35@970.53,1331.98 1062.98,1331.98 1097,1366 1097,1651 v1(1102,1656) ; v1(1912,1660) 1912,1380.93 U1.P3@1927.47,1365.46 U1.P3@1925.54,1365.46
  Bottom04 w5: v1(1102,1656) 1104,1658 1910,1658 v1(1912,1660)
A12: U1.N4 U16.36 U20.4 | length 1723.4
  Top01 w5: U20.4@579.17,1522.78 579.17,1599.17 605,1625 623.45,1625 947.97,1300.48 U16.36@970.53,1300.48 1043.48,1300.48 v1(1045,1302) ; v1(1952.48,1341.52) 1958.97,1335.03 U1.N4@1958.97,1333.96 U1.N4@1957.04,1333.96
  Bottom04 w5: v1(1045,1302) 1055.5,1312.5 1308.5,1312.5 1457.5,1461.5 1792.96,1461.5 1794.96,1459.5 1834.5,1459.5 v1(1952.48,1341.52)
A13: U1.R1 U16.20 U20.3 | length 2720.9
  Top01 w5: U20.3@598.85,1522.78 598.85,1475.69 v1@599,1475.54 ; v1(1228,1328) 1407.45,1328 U16.20@1411.45,1332 ; U1.R1@1896,1428.47 v1(1896,1713)
  Bottom04 w5: v1(1228,1328) 718.08,1328 598.85,1447.23 v1(598.85,1475.54) 598.85,1643.85 671.5,1716.5 1873.55,1716.5 1877.05,1713 v1(1896,1713)
A14: U1.R2 U16.21 U20.2 | length 2713.8
  Top01 w5: U20.2@618.54,1522.78 v1(620,1448) ; v1(1241,1370) 1404.94,1370 U16.21@1411.47,1363.47 ; v1(1864,1701) 1868.6,1701 1880.6,1689 1880.6,1412.33 U1.R2@1895.98,1396.95 U1.R2@1894.05,1396.95
  Bottom04 w5: v1(1241,1370) 1210.24,1339.24 728.76,1339.24 v1(620,1448) 620,1646.5 674.5,1701 v1(1864,1701)
A15: U1.L1 U20.1 | length 1840.2
  Top01 w5: v1@638,1467 v1(638.22,1467.22) U20.1@638.22,1522.78 ; v1(1979,1653) 2021.96,1610.04 U1.L1@2021.96,1428.45 U1.L1@2021,1429.41
  Bottom04 w5: 638.22,1475.54 638.22,1649.22 671,1682 1951,1682 1979,1654 v1(1979,1653)
A16: U1.K3 U20.48 | length 2022.6
  Top01 w5: U20.48@638.22,759 705,759 746,800 746,1169 762,1185 v1(800,1185) ; v1(2041,1378) U1.K3@2053.46,1365.46 U1.K3@2053.46,1365.46
  Bottom04 w5: v1(800,1185) 901.5,1286.5 1051.42,1286.5 1053.92,1289 1311,1289 1447.86,1425.86 1475.5,1453.5 1789.64,1453.5 1877.64,1365.5 1885.42,1365.5 1894.5,1356.42 1894.5,1343.58 1890.69,1339.77 1902.45,1328.02 2008.94,1328.02 2022.5,1341.58 2022.5,1358.44 2041,1376.94 v1(2041,1378)
A17: U1.K4 U20.17 | length 2305.2
  Top01 w5: v1(323,1470) 323.26,1470.26 U20.17@323.26,1522.78 ; v1(2038,1348) 2052.04,1333.96 U1.K4@2053.46,1333.96 U1.K4@2055.96,1333.96
  Bottom04 w5: v1(323,1470) 323,1538 354,1569 495,1569 663.5,1737.5 1966.42,1737.5 2056.5,1647.42 2056.5,1366.5 v1(2038,1348)
A18: U1.K2 U20.16 | length 2206.3
  Top01 w5: U20.16@342.94,1522.78 v1(342.94,1460.06) v1@343,1460 ; v1(1968,1714) 2037.34,1644.66 2037.34,1413.08 U1.K2@2053.46,1396.95 U1.K2@2053.46,1397.54
  Bottom04 w5: v1(342.94,1460.06) 342.94,1543.8 358.07,1558.93 499.07,1558.93 667.64,1727.5 1952,1727.5 1965.5,1714 v1(1968,1714)
A19: U1.K1 U20.9 | length 1974.8
  Top01 w5: U20.9@480.74,1522.78 480.87,1522.91 480.87,1587.87 v1(481,1588) ; v1(1958,1753) 2053.46,1657.54 U1.K1@2053.46,1428.45
  Bottom04 w5: v1(481,1588) 646,1753 v1(1958,1753)
D0: U1.U4 U16.2 U20.29 | length 2485.5
  Top01 w5: U20.29@264.2,759 264.2,650.8 443,472 1070,472 1252,654 1252,711 1306.05,765.05 U16.2@1411.47,765.05 ; v1(1826.47,1334) 1832.95,1334 U1.U4@1832.98,1333.96 U1.U4@1832.04,1333.96
  Bottom04 w5: v1(1341,765) 1341,800.33 1320.75,820.58 1320.75,960.44 1375,1014.7 1375,1203.14 1513.36,1341.5 1715.85,1341.5 1738.85,1318.5 1776.01,1318.5 1791.51,1334 v1(1826.47,1334)
D1: U1.R7 U16.4 U20.31 | length 2641.4
  Top01 w5: U20.31@303.57,759 303.57,649.43 471,482 1063,482 1241,660 1241,761 1308.04,828.04 U16.4@1411.47,828.04 ; v1(1558,1284) 1562,1288 v1(1562,1394) ; U1.R7@1895.98,1240.02 U1.R7@1895.98,1239.47 1912,1255.5 v1(1912,1314)
  Bottom04 w5: v1(1336.25,827) 1415,905.75 1415,1186.57 1512.43,1284 v1(1558,1284) ; v1(1562,1394) 1810.28,1394 1890.28,1314 v1(1912,1314)
D2: U1.T5 U16.5 U20.33 | length 2376.8
  Top01 w5: U20.33@342.94,759 342.94,648.06 499,492 1058,492 1228,662 1228,820 1267.54,859.54 v1(1336.25,859.54) U16.5@1411.47,859.54 ; v1(1855.07,1302) 1864.02,1302 U1.T5@1864.48,1302.46 U1.T5@1863.54,1302.46
  Bottom04 w5: v1(1336.25,859.54) 1336.25,900.61 1405,969.36 1405,1190.72 1513.78,1299.5 1684.44,1299.5 1696.44,1311.5 1717.56,1311.5 1743.56,1285.5 1834.5,1285.5 1851,1302 v1(1855.07,1302)
D3: U1.U5 U16.7 U20.35 | length 2311.8
  Top01 w5: U20.35@382.31,759 382.31,633.69 514,502 1053,502 1211,660 1211,865 1268.53,922.53 v1(1336.25,922.53) U16.7@1411.47,922.53 ; v1(1827.57,1301) 1831.52,1301 U1.U5@1832.98,1302.46
  Bottom04 w5: v1(1336.25,922.53) 1395,981.28 1395,1194.86 1516.14,1316 1642,1316 1647.5,1310.5 1681.3,1310.5 1692.3,1321.5 1721.7,1321.5 1734.7,1308.5 1780.15,1308.5 1789.49,1317.84 1804.16,1317.84 1821,1301 v1(1827.57,1301)
D4: U1.V3 U16.8 U20.38 | length 2234.7
  Top01 w5: U20.38@441.37,759 441.37,598.63 528,512 1048.86,512 1194,657.14 1194,887 1261.02,954.02 v1(1336.25,954.02) U16.8@1411.47,954.02 ; v1(1656,1326) 1680,1326 1719.46,1365.46 U1.V3@1801.49,1365.46
  Bottom04 w5: v1(1336.25,954.02) 1385,1002.78 1385,1199 1512,1326 v1(1656,1326)
D5: U1.V4 U16.10 U20.40 | length 2183.1
  Top01 w5: U20.40@480.74,759 480.74,586.26 545,522 1039,522 1183,666 1183,908 1292.02,1017.02 U16.10@1411.47,1017.02 ; v1(1762,1334) 1801.45,1334 U1.V4@1801.49,1333.96 U1.V4@1801.49,1334.51
  Bottom04 w5: v1(1336.25,1017) 1365,1045.75 1365,1207.28 1509.22,1351.5 1744.5,1351.5 v1(1762,1334)
D6: U1.T6 U16.11 U20.42 | length 2278.6
  Top01 w5: U20.42@520.11,759 520.11,571.89 560,532 1030,532 1169,671 1169,915 1302.51,1048.51 U16.11@1411.47,1048.51 ; v1(1857.26,1270) 1863.51,1270 U1.T6@1864.48,1270.97 U1.T6@1864.48,1271.52
  Bottom04 w5: v1(1336.25,1049) 1355,1067.75 1355,1211.86 1511.64,1368.5 1811.06,1368.5 1868.57,1311 1868.57,1287.57 1857.26,1276.26 v1(1857.26,1270)
D7: U1.R8 U16.13 U20.44 | length 2295.2
  Top01 w5: U20.44@559.48,759 559.48,554.52 572,542 1025.86,542 1158,674.14 1158,924 1345.5,1111.5 U16.13@1411.47,1111.5 ; v1(1880,1225) 1895.98,1209.02 U1.R8@1895.98,1207.98 U1.R8@1893.07,1207.98
  Bottom04 w5: v1(1336.25,1111.5) 1336.25,1207.25 1508,1379 1555.08,1379 1555.58,1378.5 1812.38,1378.5 1880,1310.88 v1(1880,1225)
D8: U1.V5 U16.42 U20.30 | length 2511.2
  Top01 w5: U20.30@283.89,759 v1(283.89,805.89) v1@284,806 ; U16.42@970.53,1111.5 v1@1019.5,1111.5 ; v1(1707,1286) 1723.46,1302.46 U1.V5@1801.49,1302.46
  Bottom04 w5: v1(283.89,805.89) 283.89,912.89 480.29,1109.29 v1(1021.71,1109.29) 1155,976 1155,821.61 1284.58,692.03 1428.31,692.03 1637.5,901.22 1637.5,1229.95 1647.05,1239.5 1661.42,1239.5 1670.5,1248.58 1670.5,1249.5 v1(1707,1286)
D9: U1.U6 U16.44 U20.32 | length 2403.9
  Top01 w5: v1@323,807 323.26,806.74 v1(323.26,806.24) U20.32@323.26,759 ; U16.44@970.53,1048.51 1021.22,1048.51 v1@1021.71,1049 ; v1(1825.51,1270) 1832.02,1270 U1.U6@1832.98,1270.97 U1.U6@1832.98,1273.02
  Bottom04 w5: v1(323.26,806.24) 323.26,914.26 457.51,1048.51 v1(1021.71,1048.51) 1145,925.22 1145,817.47 1280.44,682.03 1432.45,682.03 1647.5,897.08 1647.5,1174.5 1703.5,1230.5 1703.5,1243.5 1730,1270 v1(1825.51,1270)
D10: U1.V6 U16.45 U20.34 | length 2340.2
  Top01 w5: U20.34@362.63,759 v1(362.63,806.24) ; v1(880,1021) 882.98,1021 886.96,1017.02 U16.45@970.53,1017.02 ; v1(1737,1247) 1762,1272 1800.46,1272 U1.V6@1801.49,1270.97 U1.V6@1800.03,1270.97
  Bottom04 w5: v1(362.63,806.24) 362.63,906.63 477,1021 v1(880,1021) 1027,1021 1135,913 1135,813.32 1276.3,672.03 1436.59,672.03 1657.5,892.93 1657.5,1167.5 v1(1737,1247)
D11: U1.T7 U16.47 U20.36 | length 2389.1
  Top01 w5: v1(402,711) U20.36@402,759 ; v1(900,938.23) 900,938.98 909.18,948.15 ; 909.18,948.18 915.02,954.02 U16.47@970.53,954.02 1027.02,954.02 v1(1044,971) ; v1(1850,1225) U1.T7@1864.48,1239.47 ; U1.T7@1864.48,1239.47 U1.T7@1864.48,1241.52
  Bottom04 w5: v1(402,711) 402,801.49 386,817.49 386,905 480,999 836,999 896.77,938.23 v1(900,938.23) ; v1(1044,971) 1055,971 1125,901 1125,809.18 1272.18,662 1440.71,662 1667.5,888.79 1667.5,1163.36 1729.14,1225 v1(1850,1225)
D12: U1.U7 U16.48 U20.39 | length 2215.3
  Top01 w5: v1(461,712) 461.06,712.06 U20.39@461.06,759 ; U16.48@970.53,922.53 1033.53,922.53 v1(1033.76,922.76) v1@1034,923 ; v1(1758.3,1190.3) 1760.6,1192.6 1807.86,1192.6 1816.86,1201.61 1816.86,1214.34 1814.25,1216.95 1814.25,1220.74 U1.U7@1832.98,1239.47 U1.U7@1831.47,1239.47
  Bottom04 w5: v1(461,712) 461,815 568.76,922.76 894.14,922.76 894.41,922.5 905.59,922.5 905.86,922.76 v1(1033.76,922.76) 1048.95,907.58 1101.35,907.58 1114.43,894.5 1114.43,805.61 1268.04,652 1444.85,652 1677.5,884.65 1677.5,1159.22 1708.59,1190.3 v1(1758.3,1190.3)
D13: U1.V7 U16.50 U20.41 | length 1990.1
  Top01 w5: v1@500,805 v1(500.43,804.57) U20.41@500.43,759 ; U16.50@970.53,859.54 v1(1029.46,859.54) ; v1(1717,1159.46) 1717,1170.92 1785.55,1239.47 U1.V7@1801.49,1239.47
  Bottom04 w5: v1(500.43,804.57) 500.43,833.43 575.58,908.58 980.42,908.58 v1(1029.46,859.54) 1046.36,859.54 1263.9,642 1448.99,642 1689,882.01 1689,1154 1694.46,1159.46 v1(1717,1159.46)
D14: U1.T8 U16.51 U20.43 | length 2159.1
  Top01 w5: v1(539,804) 539,759.8 U20.43@539.8,759 ; v1(912,830) 912.98,829.02 969.55,829.02 U16.51@970.53,828.04 1043.96,828.04 v1(1054,818) ; v1(1757,1055) 1757,1090.74 1795.12,1128.86 1870.1,1128.86 1879.85,1138.62 1879.85,1192.6 U1.T8@1864.48,1207.98 U1.T8@1863.02,1207.98
  Bottom04 w5: v1(539,804) 539,845 570,876 866,876 v1(912,830) ; v1(1054,818) 1073.75,818 1259.75,632 1453.14,632 1700,878.86 1700,1128 1711.93,1139.93 1773.93,1139.93 1784,1129.86 1784,1062 1777,1055 v1(1757,1055)
D15: U1.U8 U16.53 U20.45 | length 2066.6
  Top01 w5: U20.45@579.17,759 579.17,703.83 v1(580,703) ; U16.53@970.53,765.05 v1(1021.71,765.05) v1(1021.71,765.05) ; v1(1754,1120) 1795,1161 1844,1161 1848.36,1165.36 1848.36,1192.6 U1.U8@1832.98,1207.98 U1.U8@1832.98,1210.89
  Bottom04 w5: v1(580,703) 560,723 560,837 589,866 842,866 908,800 986.76,800 v1(1021.71,765.05) 1112.57,765.05 1255.61,622 1457.28,622 1712,876.72 1712,1113 1719,1120 v1(1754,1120)